# EAGLE board supply (EAGLE 9.6.2)
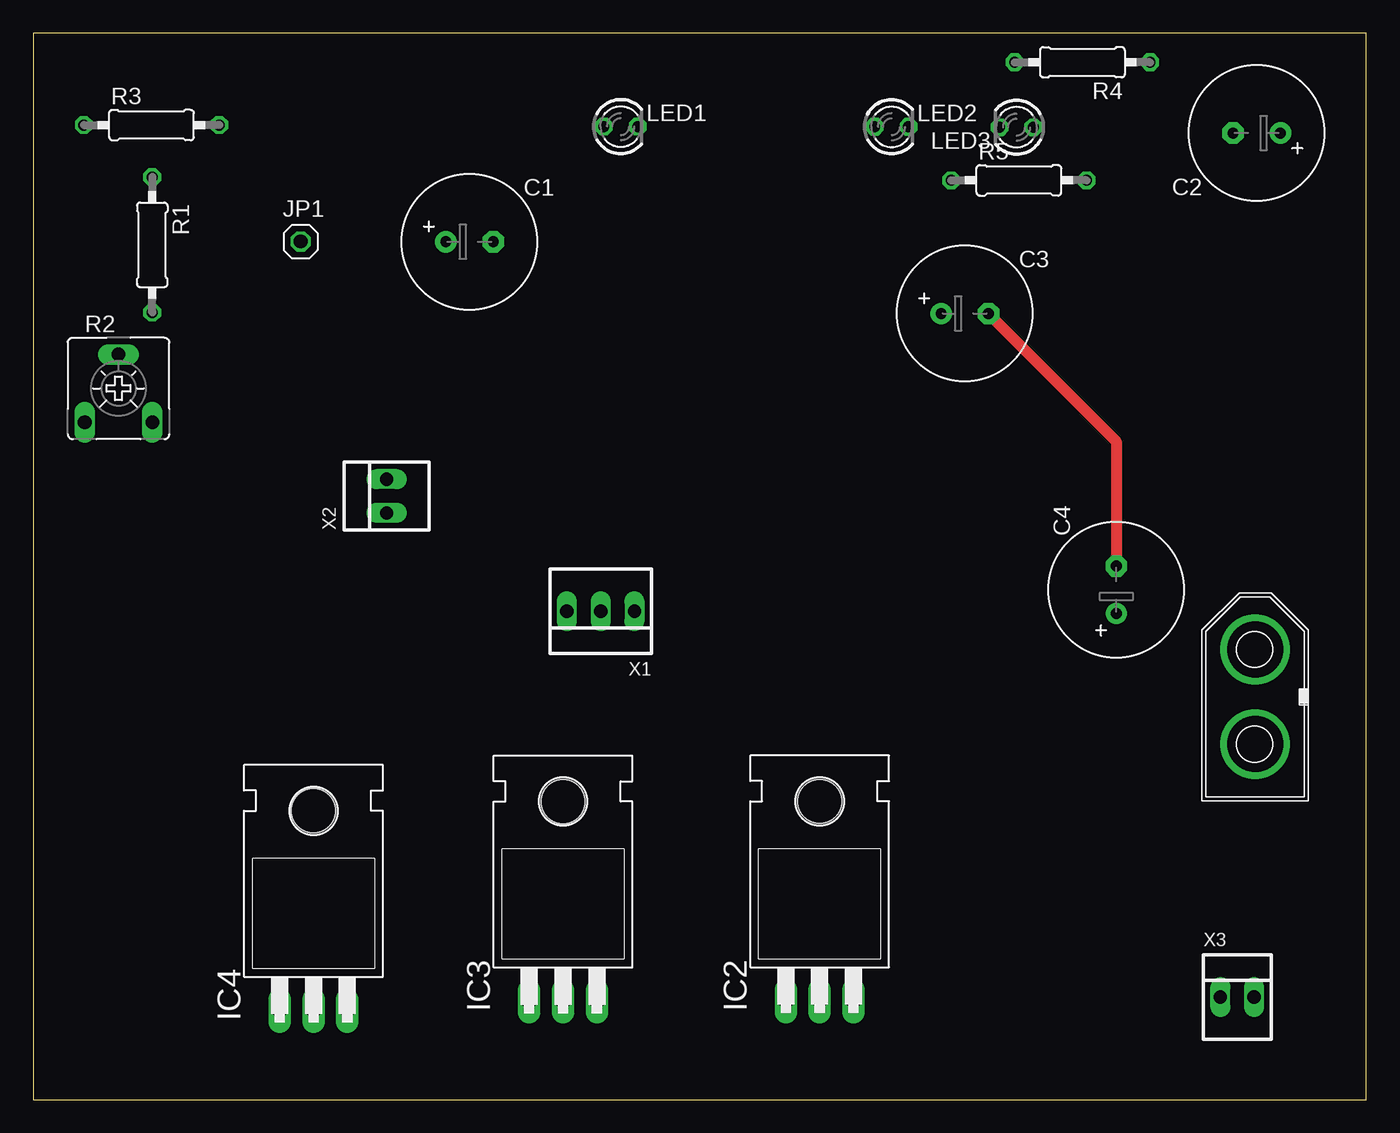
[diagram p0: board, top side]
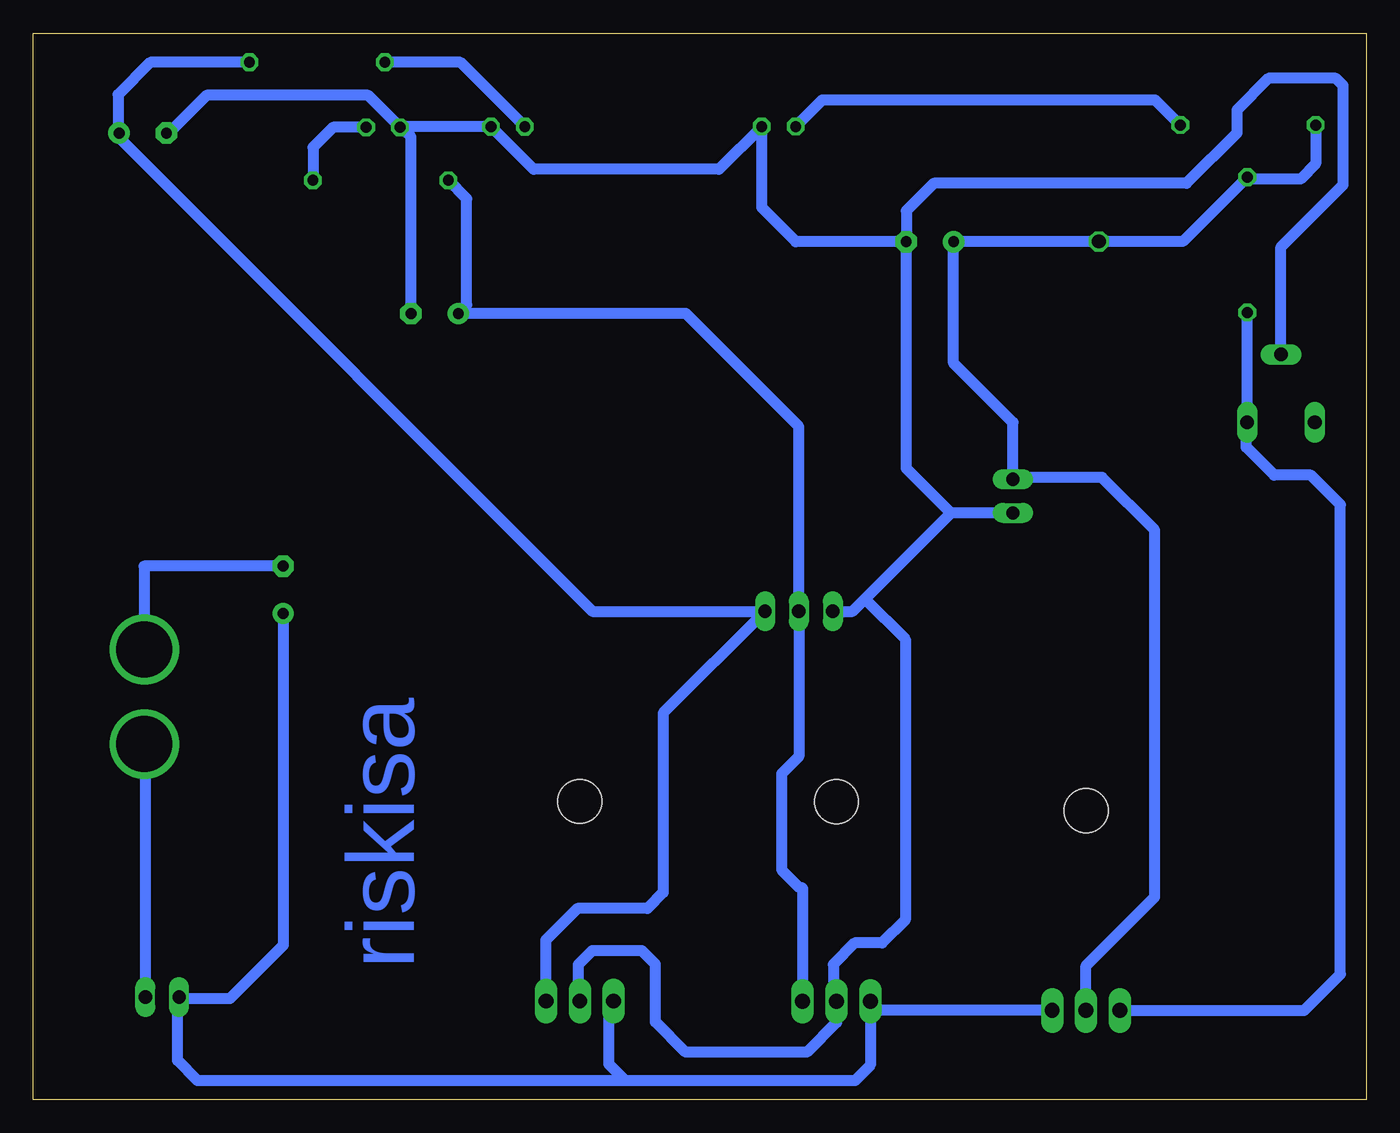
[diagram p1: board, bottom side, seen from below]

Size 100 x 80 mm. Coordinates in mm from the lower left corner, seen from the top.
Outline: 0,0 100,0 100,80 0,80 0,0
Copper layers (1*16): Top 0.035mm / dielectric 1.5mm / Bottom 0.035mm
Design rules "default": minimum track width 6mil, minimum drill 0.35mm, track to track 6mil, track to pad 6mil, pad to pad 6mil, via to via 6mil, smd to smd 6mil, copper to edge 40mil, drill to drill 6mil, minimum pad ring 10mil, minimum via ring 8mil, stop-mask expansion 4mil, vias tented up to drill 0mil, thermal gap 10mil

## Footprints (pad centres in the part's own frame; a part is rotated, then mirrored left to right if it is on the bottom)
E3,5-10 = drill 0.813 pad 1.6: + -1.778,0 | drill 0.813 pad 1.6 octagon: - 1.778,0
TO220H = drill 1.118 long: 1 -2.54,-10.16; 2 0,-10.16; 3 2.54,-10.16 | hole 3.302: 0,4.826
1X01 = drill 1.016 octagon: 1 0,0
LED3MM = drill 0.813 octagon: A -1.27,0; K 1.27,0
0207/10 = drill 0.813 octagon: 1 -5.08,0; 2 5.08,0
CA6V = drill 1.016 long: A -2.54,-2.54; E 2.54,-2.54; S 0,2.54
CON-XT60M = drill 4.2: V+ -3.55,0; V- 3.55,0
22-23-2031 = drill 1 long: 1 -2.54,0; 2 0,0; 3 2.54,0
22-23-2021 = drill 1 long: 1 -1.27,0; 2 1.27,0

## Placement (x,y rotation side)
C1  1000uF/16V  [E3,5-10]  32.73,64.36 0 top
C2  1000uF/16V  [E3,5-10]  91.79,72.52 180 top
C3  1000uF/16V  [E3,5-10]  69.89,58.97 0 top
C4  1000uF/16V  [E3,5-10]  81.25,38.25 90 top
IC2  7805T  [TO220H]  59,17.55 0 top
IC3  7805T  [TO220H]  39.74,17.53 0 top
IC4  317T  [TO220H]  21.02,16.84 0 top
JP1  [1X01]  20.06,64.37 0 top
LED1  [LED3MM]  44.07,73 0 top
LED2  [LED3MM]  64.39,72.99 0 top
LED3  [LED3MM]  73.76,72.95 180 top
R1  1K2  [0207/10]  8.92,64.13 270 top
R2  20K  [CA6V]  6.39,53.36 0 top
R3  1K  [0207/10]  8.87,73.12 0 top
R4  1K  [0207/10]  78.71,77.83 180 top
R5  1K  [0207/10]  73.94,68.97 0 top
VIN  [CON-XT60M]  91.67,30.22 90 top
X1  VSYS  [22-23-2031]  42.56,36.64 180 top
X2  VMOT  [22-23-2021]  26.5,45.28 90 top
X3  switch  [22-23-2021]  90.33,7.69 0 top

## Library data of the parts
C1-C4 R1 R3-R5 = rcl
IC2-IC4 = linear
JP1 = pinhead
LED1-LED3 = led
R2 = pot
VIN = con-XT60M
X1 = con-molex; MF: MOLEX; MPN: 22-23-2031; OC_FARNELL: 1462950; OC_NEWARK: 30C0862
X2 X3 = con-molex; MF: MOLEX; MPN: 22-23-2021; OC_FARNELL: 1462926; OC_NEWARK: 25C3832

## Nets
+12V: C3.+ IC3.3 R5.1 X1.2
GND: C1.- C2.- C3.- C4.- IC2.2 IC3.2 LED1.K LED2.K LED3.K R2.S VIN.V- X1.3 X2.1
N$1: IC4.1 R1.2 R2.E
N$2: LED1.A R3.2
N$3: LED3.A R5.2
N$4: VIN.V+ X3.2
N$5: LED2.A R4.2
VCC: C2.+ IC2.3 R4.1 X1.1
VDD: C1.+ IC4.2 JP1.1 R1.1 R3.1 X2.2
VPP: C4.+ IC2.1 IC3.1 IC4.3 X3.1

## Tracks (layer width: path | path; a pad name or v marks a point on that pad's centre or on a via)
+12V
  Bottom 0.813: R5.1 67.47,67.58 67.47,59.61 C3.+ 51.05,58.97 42.56,50.49 X1.2 42.56,25.73 43.86,24.43 43.86,17.25 42.5,15.89 42.34,15.89 42.28,15.82 IC3.3
GND
  Top 0.813: C3.- 81.25,49.39 C4.-
  Bottom 0.813: 6.44,55.85 R2.S 6.39,63.96 1.73,68.63 1.73,76.08 2.26,76.62 7.33,76.62 9.7,74.25 9.7,72.52 13.48,68.74 32.45,68.74 34.51,66.68 C1.- | C1.- 42.78,64.36 45.34,66.92 LED1.K 48.56,69.79 62.46,69.79 LED2.K 72.42,72.99 | X2.1 31.16,44.01 | C1.- 34.51,47.35 31.16,44.01 | C2.- 89.91,72.42 87,75.34 74.88,75.34 LED3.K 72.47,72.94 72.42,72.99 | C3.- 71.67,72.24 72.42,72.99 | 40.08,36.69 X1.3 38.53,36.64 37.61,37.56 | 37.61,37.56 31.16,44.01 | 37.61,37.56 34.59,34.54 34.59,13.47 36.31,11.74 38.38,11.74 39.99,10.13 39.99,7.62 IC3.2 39.74,5.79 41.97,3.56 51.06,3.56 53.32,5.82 53.32,10.16 54.34,11.17 58.07,11.17 59.13,10.11 59.13,7.52 IC2.2 | C4.- 91.7,40.02 91.7,33.8 VIN.V-
N$1
  Bottom 0.813: R1.2 8.94,59.03 R2.E 9,50.75 9,48.95 6.9,46.85 4.14,46.85 1.93,44.64 1.93,9.4 4.65,6.68 IC4.1
N$2
  Bottom 0.813: R3.2 15.82,74.99 40.81,74.99 LED1.A
N$3
  Bottom 0.813: LED3.A 77.52,72.95 79.02,71.45 R5.2
N$4
  Bottom 0.813: VIN.V+ 91.6,26.67 X3.2
N$5
  Bottom 0.813: 62.97,72.84 LED2.A 67.96,77.83 R4.2
VCC
  Bottom 0.813: R4.1 91.22,77.83 93.65,75.4 93.65,72.6 C2.+ 93.57,72.16 58.05,36.64 X1.1 | X1.1 52.74,29 52.74,15.53 53.93,14.34 59.18,14.34 61.56,11.96 61.56,6.96 61.67,6.85 61.67,7.25 IC2.3 | X1.1
VDD
  Bottom 0.813: 30.95,64.21 30.95,55.25 26.5,50.8 X2.2 26.37,46.68 19.82,46.68 15.86,42.71 15.86,15.2 21.02,10.03 IC4.2 | 30.95,64.21 C1.+ | 18.78,64.37 JP1.1 | JP1.1 30.78,64.37 30.95,64.21 | R3.1 3.79,70.2 4.92,69.07 8.78,69.07 R1.1 13.76,64.37 JP1.1
VPP
  Bottom 0.813: IC4.3 36.51,6.68 IC3.1 37.2,2.57 38.35,1.42 55.58,1.42 | 55.58,1.42 56.82,2.66 56.82,7.02 IC2.1 | 55.58,1.42 87.68,1.42 89.19,2.93 89.19,7.56 | 89.19,7.56 X3.1 | C4.+ 81.25,11.57 85.27,7.56 89.19,7.56

## Text on the board
Bottom: riskisa